# Altium PCB CFD_2Channel.PcbDoc (part 3 of 3)
Units mil, origin at the board's own origin, x right, y up, seen from the top; angles counter-clockwise.
Board outline 5560 x 8750 mil, 4 copper layers (Top Layer, Top Plane, Bottom Plane, Bottom Layer), stack 61.356 mil thick; 216 components, 185 nets, 910 pads, 397 vias.
Unrouted connection lines stored in the file: 1.
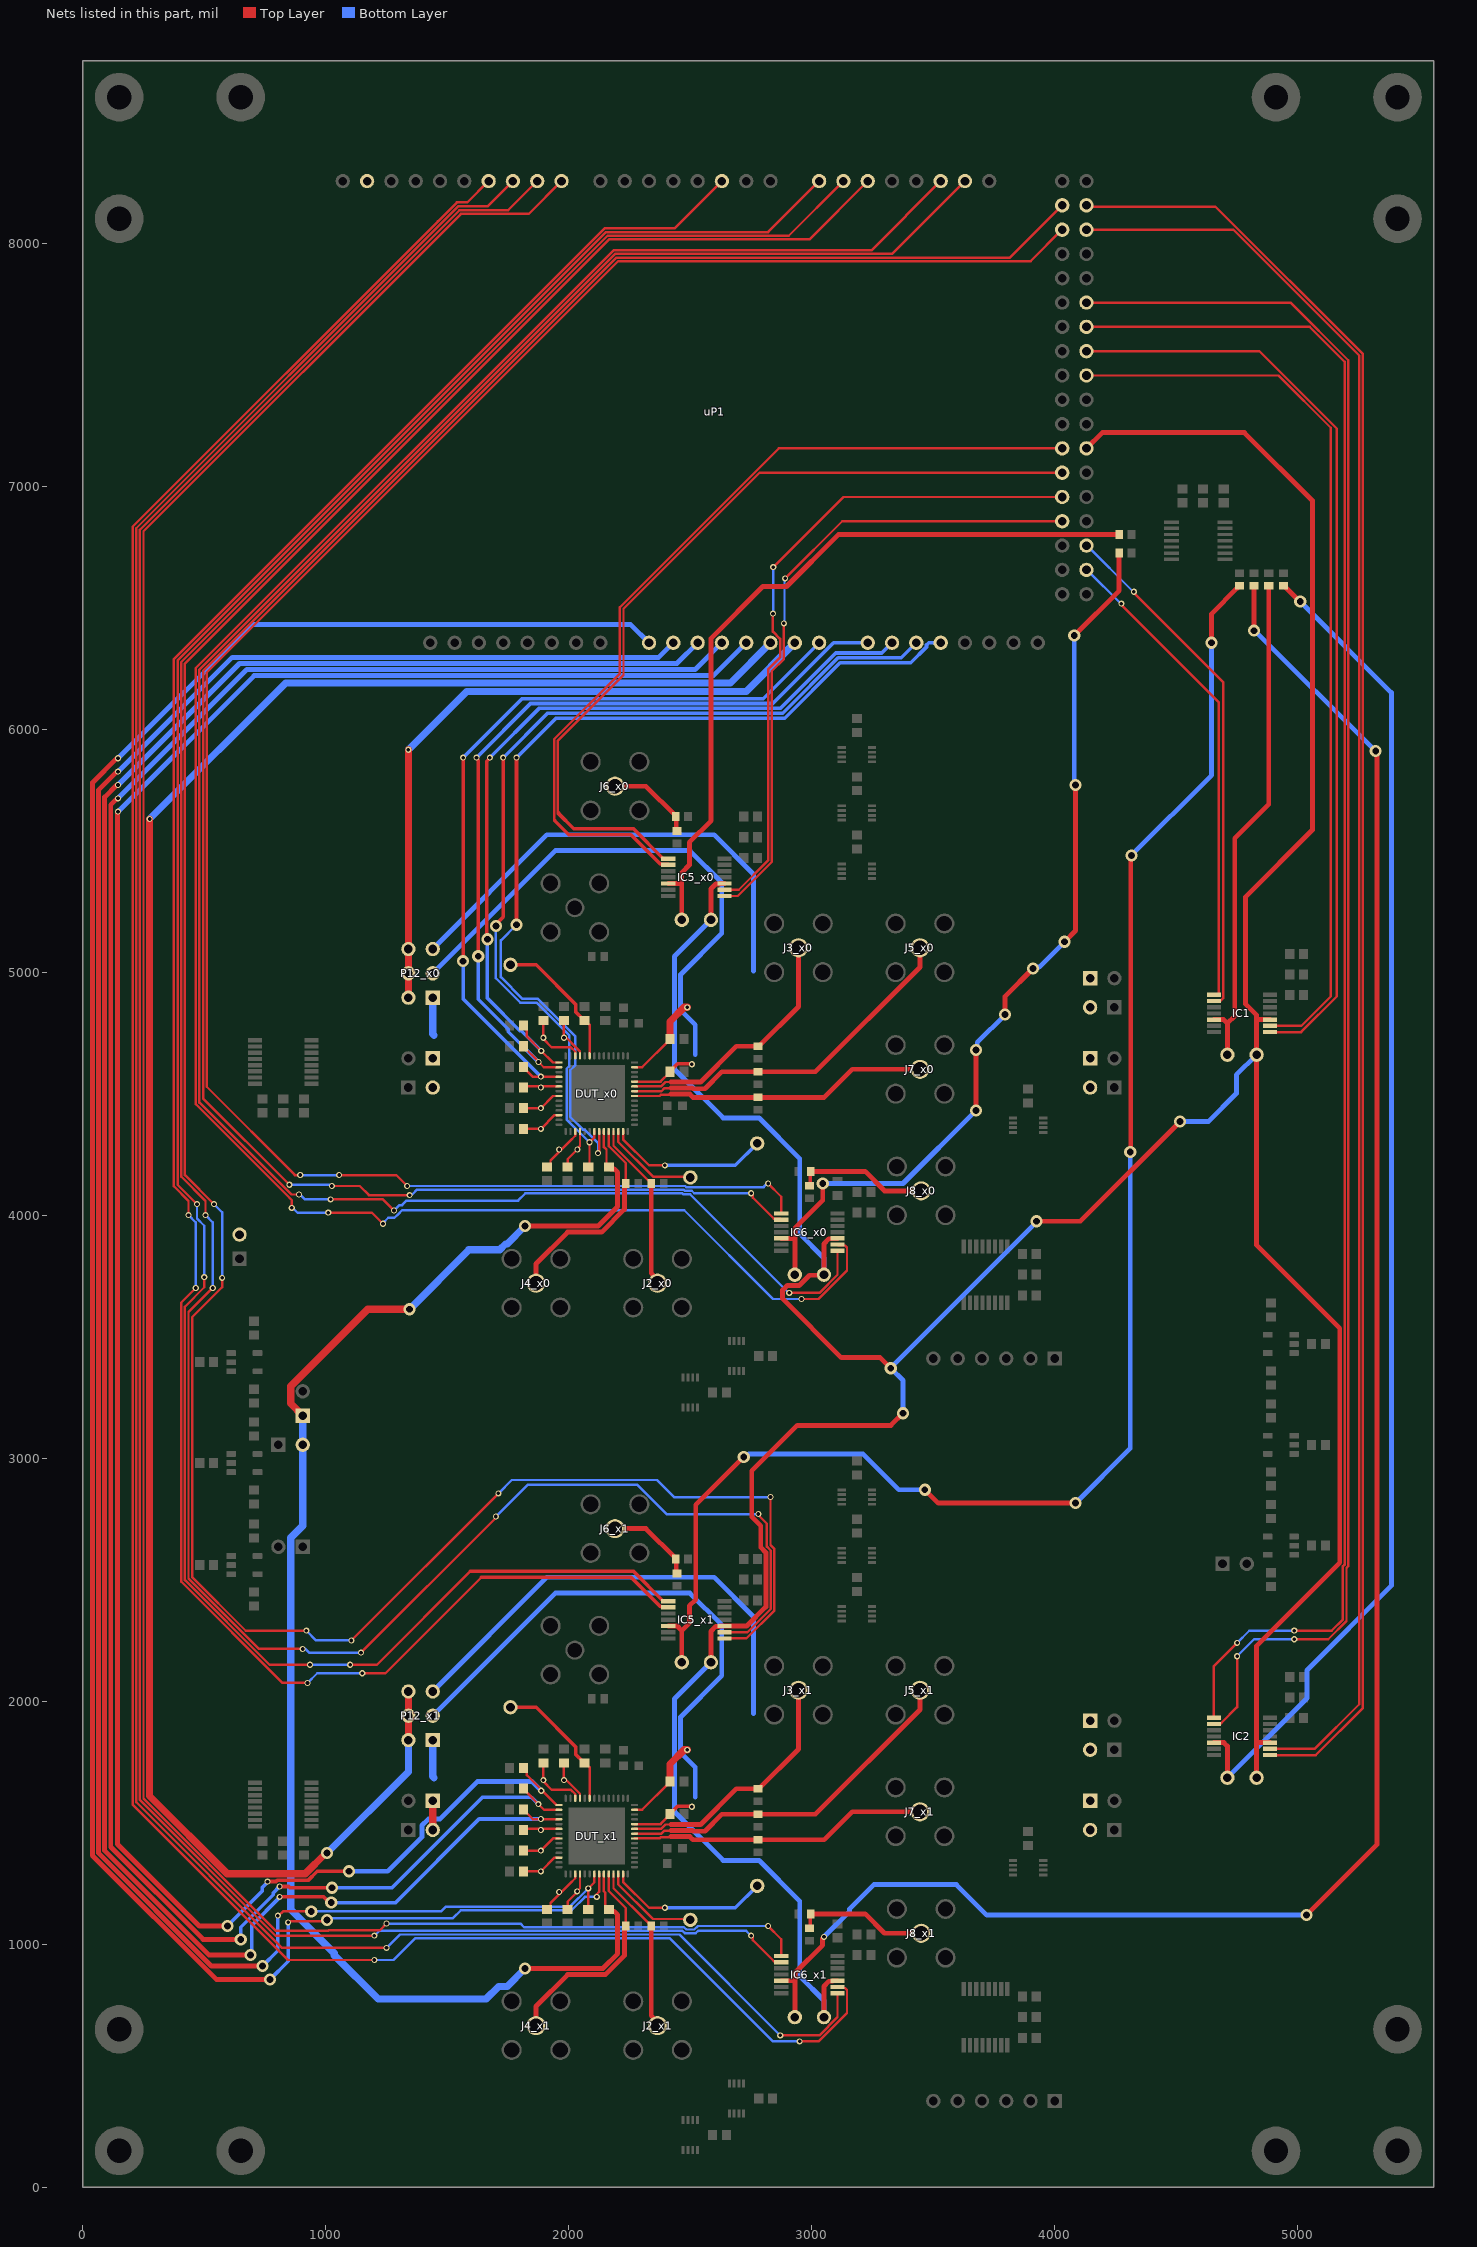
[diagram p5: the nets of this part, all layers, seen from the top]

## Via types
v1: diameter 25, hole 15, Top Layer to Bottom Layer, 290 vias
v2: diameter 50, hole 28, Top Layer to Bottom Layer, 105 vias
v3: diameter 59.06, hole 35.43, Top Layer to Bottom Layer, 2 vias

## Nets (pads, with @x,y where several pads share a name; then routed paths per layer and width w, separated by ;. In a path a pad name is that pad's centre, name@x,y a point inside that pad or via, vN(x,y) a via of type N, cw(c..) or ccw(c..) an arc to the next point about the centre after c; other vN are vias at no path point) (continued)
SPI_DIN_33: IC1.10 IC2.10 IC5_x0.10 IC5_x1.10 IC6_x0.10 IC6_x1.10 P6.1 P8.1 P11_x0.1 P11_x1.1 P14_x0.1 P14_x1.1 uP1.43 | length 15947.3
  Top Layer w20: P11_x1.1@2585,2160 2585,2287.26 2605.42,2307.68 2621.04,2307.68 2622.78,2309.41 IC5_x1.10@2640.67,2309.41 2732.08,2309.41 2810.79,2388.12 2810.79,2611.88 2790,2632.67 2790,2721.11 2752.5,2758.61 2752.5,2947.5 2940,3135 3325,3135 v2(3375,3185) ; P11_x0.1@2585,5215 2585,5342.26 2605.42,5362.68 2621.04,5362.68 2622.78,5364.41 IC5_x0.10@2640.67,5364.41 ; P14_x1.1@3050,700 3050,827.26 3070.42,847.68 3086.04,847.68 3087.78,849.41 IC6_x1.10@3105.67,849.41 ; IC6_x0.10@3105.67,3904.41 3087.78,3904.41 3086.04,3902.68 3070.42,3902.68 3050,3882.26 P14_x0.1@3050,3755 3047.5,3752.5 2990.47,3752.5 2948.44,3710.47 2898.62,3710.47 2879.54,3691.39 2879.54,3656.05 3121.79,3413.8 3281.2,3413.8 v2(3325,3370) ; v2(3925,3975) 4105,3975 v2(4515,4385) ; uP1.43@4130,7155 4195,7220 4780,7220 5060,6940 5060,5585 4785,5310 4785,4868.1 4830,4823.1 4830,4802.68 ; P6.1@4830,1685 4830,1830 ; IC2.10@4885.67,1829.41 4830.59,1829.41 4830,1830 ; IC1.10@4885.67,4804.41 4831.73,4804.41 4830,4802.68 ; 4830,1830 4830,2228.08 5172.24,2570.32 5172.24,3534.32 4830,3876.57 P8.1@4830,4660 4830,4782.26 4830,4802.68
  Bottom Layer w20: P11_x1.1@2585,2160 2435,2010 2435,1545 2635,1345 2782.47,1345 2950,1177.47 2950,868.43 3050,768.43 P14_x1.1@3050,700 ; P11_x0.1@2585,5215 2435,5065 2435,4600 2635,4400 2782.47,4400 2950,4232.47 2950,3923.43 3050,3823.43 P14_x0.1@3050,3755 ; v2(3375,3185) 3375,3320 v2(3325,3370) 3325,3372.5 3925,3972.5 v2(3925,3975) ; v2(4515,4385) 4631.57,4385 4747.05,4500.48 4747.05,4577.05 P8.1@4830,4660
SPI_DOUT_MAIN_DUAL_33: IC1.9 uP1.37 | length 3733.6
  Top Layer w10: uP1.37@4130,7455 4920,7455 5135,7240 5135,4900 5013.82,4778.82 IC1.9@4885.67,4778.82
SPI_DOUT_MAIN_SINGLE_330: IC5_x0.9 uP1.46 | length 2785.1
  Top Layer w10: IC5_x0.9@2640.67,5338.82 2699.42,5338.82 2820,5459.4 2820,6245 2869.53,6294.53 2869.53,6371.37 2840,6400.9 v1(2840,6475) ; v1@2835.87,6660.87 3130,6955 uP1.46@4030,6955
  Bottom Layer w10: v1(2840,6475) 2841.07,6476.07 v1(2841.07,6666.06)
SPI_DOUT_MAIN_SINGLE_331: IC5_x1.9 uP1.15/RX3 | length 10862.7
  Top Layer w10: v1(505,4000) 505,4058.79 405,4158.79 405,4432.11 405,6275.77 2159.23,8030 2905,8030 uP1.15/RX3@3130,8255 ; v1(535,3700) 533.79,3700 435,3601.21 435,2504.64 724.64,2215 v1(905,2215) ; v1(1145,2200) 1697.13,2752.13 1697.13,2757.13 v1(1700,2760) ; IC5_x1.9@2640.67,2283.82 2734.77,2283.82 2830.79,2379.83 2830.79,2620.17 2815,2635.95 2815,2730.01 2780,2765.01 v1(2780,2770)
  Bottom Layer w10: v1(505,4000) 535,3970 v1(535,3700) ; v1(905,2215) 915.82,2215 930.82,2200 v1(1145,2200) ; v1(1700,2760) 1830,2890 2282.6,2890 2402.6,2770 v1(2780,2770)
SPI_DOUT_SMALL_DUAL_33: IC2.9 uP1.25 | length 7328.8
  Top Layer w10: uP1.25@4130,8055 4733.79,8055 5252.24,7536.54 5252.24,3907.76 5252.24,1987.24 5068.82,1803.82 IC2.9@4885.67,1803.82
SPI_DOUT_SMALL_SINGLE_330: IC6_x0.9 uP1.19/RX1 | length 8954
  Top Layer w10: v1(860,4030) 860,4061.97 851.97,4070 465,4456.97 465,6250.92 2184.08,7970 3245,7970 uP1.19/RX1@3530,8255 ; v1(1010,4010) 1190,4010 v1(1235.48,3964.52) ; v1(2957.5,3655) 3027.11,3655 3144.7,3772.59 3144.7,3866.23 3135.97,3874.96 3109.53,3874.96 IC6_x0.9@3105.67,3878.82
  Bottom Layer w10: v1(860,4030) 864.06,4030 884.06,4010 v1(1010,4010) ; v1(1235.48,3964.52) 1235.48,3967.55 1256.95,3989.02 1282.8,3989.02 1296.44,4002.65 1313.79,4020 2475,4020 2840,3655 v1(2957.5,3655)
SPI_DOUT_SMALL_SINGLE_331: IC6_x1.9 uP1.11 | length 10919.3
  Top Layer w10: v1(1200,935) 845,935 205,1575 205,6832.57 1461.21,8088.79 1539.63,8167.2 1582.2,8167.2 uP1.11@1670,8255 ; v1(2950,600) 3027.11,600 3144.7,717.59 3144.7,811.23 3135.97,819.96 3109.53,819.96 IC6_x1.9@3105.67,823.82
  Top Layer w15: uP1.11@1670,8255 uP1.11@1672.03,8252.97
  Bottom Layer w10: v1(1200,935) 1278.79,935 1368.79,1025 2415,1025 2840,600 v1(2950,600)
TDC_CLK_MAIN_DUAL: IC1.5 P9.1 R16.1 | length 2062
  Top Layer w20: IC1.5@4654.33,4804.41 4694.41,4804.41 4710,4788.82 ; P9.1@4710,4660 4710,4788.82 ; R16.1@4880,6589.41 4880,5690 4740,5550 4740,4818.82 4710,4788.82
TDC_CLK_MAIN_SINGLE0: IC5_x0.5 P10_x0.1 R1.1 | length 3114.6
  Top Layer w20: IC5_x0.5@2409.33,5364.41 2460,5364.41 ; P10_x0.1@2465,5215 2465,5409.46 2496.33,5440.78 2496.33,5533.83 2585.47,5622.97 2585.47,6373.44 2798.75,6586.72 2895.61,6586.72 3108.89,6800 R1.1@4264.41,6800
TDC_CLK_MAIN_SINGLE1: IC5_x1.5 P10_x1.1 R18.1 | length 6524.1
  Top Layer w20: IC5_x1.5@2409.33,2309.41 2445.59,2309.41 2465,2290 ; P10_x1.1@2465,2160 2465,2290 ; v2(2720,3005) 2522.5,2807.5 2522.5,2418.13 2496.33,2391.96 2496.33,2321.33 2465,2290 ; v2(3465,2870) 3520,2815 v2(4085,2815) ; v2(4310,4260) 4312.5,4262.5 4312.5,5477.5 v2(4315,5480) ; v2(4645,6355) 4645,6474.41 4751.3,6580.71 4751.3,6583.66 4757.05,6589.41 R18.1@4760,6589.41
  Bottom Layer w20: v2(2720,3005) 2728.12,3005 2740.62,3017.5 3209.93,3017.5 3357.43,2870 v2(3465,2870) ; v2(4085,2815) 4310,3040 v2(4310,4260) ; v2(4315,5480) 4645,5810 v2(4645,6355)
TDC_CLK_SMALL_DUAL: IC2.5 P7.1 R14.1 | length 5563.2
  Top Layer w20: IC2.5@4654.33,1829.41 4695.59,1829.41 4710,1815 P7.1@4710,1685 ; R14.1@4940,6589.41 4942.95,6589.41 5007.36,6525 v2(5010,6525)
  Bottom Layer w20: P7.1@4710,1685 5037.5,2012.5 5037.5,2127.5 5385,2475 5385,6150 v2(5010,6525)
TDC_CLK_SMALL_SINGLE0: IC6_x0.5 P13_x0.1 R17.1 | length 3782.6
  Top Layer w20: IC6_x0.5@2874.33,3904.41 2925,3904.41 ; P13_x0.1@2930,3755 2930,3945.94 3045,4060.94 v2(3045,4130) ; v2(3675,4430) v2(3675,4680) ; v2(3795,4825) 3795,4900 v2(3910,5015) ; v2(4040,5125) 4085,5170 v2(4085,5770) ; v2(4080,6385) 4080.13,6385 4264.41,6569.28 R17.1@4264.41,6725
  Bottom Layer w20: v2(3045,4130) 3375,4130 v2(3675,4430) ; v2(3675,4680) 3680.74,4685.74 3680.74,4710.74 v2(3795,4825) ; v2(3910,5015) 3915.74,5020.74 3935.74,5020.74 v2(4040,5125) ; v2(4080,6385) 4080,5775 v2(4085,5770)
TDC_CLK_SMALL_SINGLE1: IC6_x1.5 P13_x1.1 R15.1 | length 8362.3
  Top Layer w20: IC6_x1.5@2874.33,849.41 2923.63,849.41 ; P13_x1.1@2930,700 2930,855.78 2930,881.57 3044.26,995.83 3044.26,1024.26 v1(3050,1030) ; v2(4820,6405) R15.1@4820,6589.41 ; v2(5035,1120) 5325,1410 5325,5905 v2(5320,5910)
  Bottom Layer w20: v1(3050,1030) 3155.37,1135.37 3155.37,1145.37 3255,1245 3595,1245 3720,1120 v2(5035,1120) ; v2(4820,6405) 4822.5,6405 5317.5,5910 v2(5320,5910)
TDC_EN_MAIN_DUAL_33: IC1.1 uP1.53 | length 1990.1
  Top Layer w10: v1@4272.5,6512.5 4673.58,6111.42 4673.58,4910.63 4669.72,4906.77 IC1.1@4654.33,4906.77
  Bottom Layer w10: uP1.53@4130,6655 4132.65,6655 4271.22,6516.43 v1(4273.87,6516.43)
TDC_EN_MAIN_SINGLE_330: IC5_x0.1 uP1.44 | length 3521.1
  Top Layer w10: 1957.5,5655 1955,5657.5 1955,5952.42 2225,6222.42 2225,6495 2785,7055 uP1.44@4030,7055
  Top Layer w15: 1957.5,5655 1957.5,5652.5 2020,5590 2265.93,5590 2389.15,5466.77 IC5_x0.1@2409.33,5466.77
TDC_EN_MAIN_SINGLE_331: IC5_x1.1 uP1.14/TX3 | length 9663.7
  Top Layer w10: v1(470,4045) 390,4125 390,5677.63 390,6281.98 2153.02,8045 2820,8045 uP1.14/TX3@3030,8255 ; v1(500,3745) 500,3703.18 420,3623.18 420,2498.43 768.43,2150 v1(935,2150) ; v1(1100,2150) 1210,2150 1595,2535
  Top Layer w15: 1595,2535 2265.93,2535 2389.15,2411.77 IC5_x1.1@2409.33,2411.77
  Bottom Layer w10: v1(470,4045) 470,3986.21 500,3956.21 v1(500,3745) ; v1(935,2150) v1(1100,2150)
TDC_EN_SMALL_DUAL_33: IC2.1 uP1.33 | length 7122.8
  Top Layer w10: uP1.33@4130,7655 5048.93,7655 5192.24,7511.69 5192.24,6969.08 5192.24,3542.61 5192.24,2562.04 5185,2554.79 5185,2336.21 5138.79,2290 v1(4985,2290) ; IC2.1@4654.33,1931.77 4654.33,2144.33 v1(4750,2240)
  Bottom Layer w10: v1(4750,2240) 4800,2290 v1(4985,2290)
TDC_EN_SMALL_SINGLE_330: IC6_x0.1 uP1.24 | length 8611.8
  Top Layer w10: v1(895,4165) 873.18,4165 510,4528.18 510,6232.28 2202.72,7925 3900,7925 uP1.24@4030,8055 ; v1(1055,4165) 1290,4165 v1(1335,4120) ; v1(2820,4130) 2874.33,4075.67 IC6_x0.1@2874.33,4006.77
  Bottom Layer w10: v1(895,4165) v1(1055,4165) ; v1(1335,4120) 2479.1,4120 2483.63,4115.47 2801.41,4115.47 2815.94,4130 v1(2820,4130)
TDC_EN_SMALL_SINGLE_331: IC6_x1.1 uP1.8 | length 10501.1
  Top Layer w10: v1(1250,1085) 1222.5,1057.5 1012.5,1057.5 1010,1055 794.64,1055 250,1599.64 250,6813.93 1556.07,8120 1835,8120 uP1.8@1970,8255 ; v1(2820,1075) 2874.33,1020.67 IC6_x1.1@2874.33,951.77
  Bottom Layer w10: v1(1250,1085) 1800.5,1085 1815.5,1070 2474.1,1070 2483.63,1060.47 2516.37,1060.47 2530.9,1075 v1(2820,1075)
TDC_INTRb_MAIN_DUAL_33: IC1.8 uP1.35 | length 3833.4
  Top Layer w10: uP1.35@4130,7555 4841.21,7555 5160,7236.21 5160,4900 5013.23,4753.23 IC1.8@4885.67,4753.23
TDC_INTRb_MAIN_SINGLE_330: IC5_x0.8 uP1.48 | length 2670.9
  Top Layer w10: IC5_x0.8@2640.67,5313.23 2695.04,5313.23 2835,5453.19 2835,6238.79 2885,6288.79 v1(2885,6435) ; v1@2895.88,6625.88 3125,6855 uP1.48@4030,6855
  Bottom Layer w10: v1(2885,6435) 2887.5,6437.5 2887.5,6617.5 v1(2890,6620)
TDC_INTRb_MAIN_SINGLE_331: IC5_x1.8 uP1.16/TX2 | length 11022
  Top Layer w10: v1(540,4045) 420,4165 420,4438.33 420,6269.56 2165.44,8015 2990,8015 uP1.16/TX2@3230,8255 ; v1(573.33,3742.15) 573.33,3703.33 450,3580 450,2510.86 670.86,2290 v1(920,2290) ; v1(1105,2250) v1(1710,2855) ; IC5_x1.8@2640.67,2258.23 2730.39,2258.23 2845.79,2373.62 2845.79,2626.38 2830,2642.17 v1(2830,2840)
  Bottom Layer w10: v1(540,4045) 573.33,4011.67 v1(573.33,3742.15) ; v1(920,2290) 960,2250 v1(1105,2250) ; v1(1710,2855) 1765,2910 2362.97,2910 2432.97,2840 v1(2830,2840)
TDC_INTRb_SMALL_DUAL_33: IC2.8 uP1.23 | length 7423.3
  Top Layer w10: uP1.23@4130,8155 4135,8150 4660,8150 5267.24,7542.76 5267.24,4473.62 5267.24,1972.24 5073.23,1778.23 IC2.8@4885.67,1778.23
TDC_INTRb_SMALL_SINGLE_330: IC6_x0.8 uP1.20/SDA | length 8902.5
  Top Layer w10: v1(890,4085) 858.18,4085 480,4463.18 480,6244.71 2190.29,7955 3330,7955 uP1.20/SDA@3630,8255 ; v1(1020,4065) 1235,4065 v1(1280.98,4019.02) ; v1(2907.04,3680) 3030.9,3680 3105.67,3754.77 IC6_x0.8@3105.67,3853.23
  Bottom Layer w10: v1(890,4085) 894.06,4085 914.06,4065 v1(1020,4065) ; v1(1280.98,4019.02) 1303.36,4041.39 1313.96,4041.39 1332.57,4060 1791.36,4060 1821.36,4090 2466.67,4090 2471.2,4085.47 2499.53,4085.47 2905,3680 v1(2907.04,3680)
TDC_INTRb_SMALL_SINGLE_331: IC6_x1.8 uP1.10 | length 10844.3
  Top Layer w10: v1(1250,985) 820,985 220,1585 220,6826.36 1471.82,8078.18 1545.84,8152.2 1667.2,8152.2 uP1.10@1770,8255 ; v1(2870,625) 3030.9,625 3105.67,699.77 IC6_x1.8@3105.67,798.23
  Top Layer w15: uP1.10@1770,8255 uP1.10@1772.03,8252.97
  Bottom Layer w10: v1(1250,985) 1305,1040 2455,1040 v1(2870,625)
TDC_START_MAIN_x0: J6_x0.1 R6_x0.1 R8_x0.2 | length 364.6
  Top Layer w20: J6_x0.1@2190,5765 2317.36,5765 2439.41,5642.95 R8_x0.2@2439.41,5640 2442.2,5637.2 2442.2,5583.39 R6_x0.1@2445,5580.59
TDC_START_MAIN_x1: J6_x1.1 R6_x1.1 R8_x1.2 | length 364.6
  Top Layer w20: J6_x1.1@2190,2710 2317.36,2710 2439.41,2587.95 R8_x1.2@2439.41,2585 2442.2,2582.2 2442.2,2528.39 R6_x1.1@2445,2525.59
TDC_START_SMALL_x0: J8_x0.1 R9_x0.1 R11_x0.2 | length 549.3
  Top Layer w15: R9_x0.1@2990,4120.59 2992.8,4123.39 2992.8,4177.2 R11_x0.2@2995.59,4180
  Top Layer w20: R11_x0.2@2995.59,4180 3219.13,4180 3299.13,4100 J8_x0.1@3450,4100
TDC_START_SMALL_x1: J8_x1.1 R9_x1.1 R11_x1.2 | length 549.3
  Top Layer w15: R9_x1.1@2990,1065.59 2992.8,1068.39 2992.8,1122.2 R11_x1.2@2995.59,1125
  Top Layer w20: R11_x1.2@2995.59,1125 3219.13,1125 3299.13,1045 J8_x1.1@3450,1045
TDC_TRIGG_MAIN_DUAL_33: IC1.2 uP1.51 | length 2141.8
  Top Layer w10: v1(4325,6565) 4325,6560 4693.37,6191.63 4693.37,4893.77 4684.63,4885.04 4658.19,4885.04 IC1.2@4654.33,4881.18
  Bottom Layer w10: uP1.51@4130,6755 4132.5,6755 4322.5,6565 v1(4325,6565)
TDC_TRIGG_MAIN_SINGLE_330: IC5_x0.2 uP1.42 | length 3624.3
  Top Layer w10: 1942.5,5625 1940,5627.5 1940,5958.63 2210,6228.63 2210,6501.21 2863.79,7155 uP1.42@4030,7155
  Top Layer w15: 1942.5,5625 1942.5,5622.5 2000,5565 2255.53,5565 2375.12,5445.41 2379.01,5445.41 2381.88,5442.54 2407.97,5442.54 IC5_x0.2@2409.33,5441.18
TDC_TRIGG_MAIN_SINGLE_331: IC5_x1.2 uP1.2 | length 9336.4
  Top Layer w10: v1(435,4000) 435,4058.79 375,4118.79 375,5671.42 375,6288.2 2146.8,8060 2435,8060 uP1.2@2630,8255 ; v1(465,3700) 405,3640 405,2492.22 822.22,2075 v1(925,2075) ; v1(1150,2115) 1245.02,2115 1640.02,2510
  Top Layer w15: 1640.02,2510 2255.53,2510 2375.12,2390.41 2379.01,2390.41 2381.88,2387.54 2407.97,2387.54 IC5_x1.2@2409.33,2386.18
  Bottom Layer w10: v1(435,4000) 465,3970 v1(465,3700) ; v1(925,2075) 965,2115 v1(1150,2115)
TDC_TRIGG_SMALL_DUAL_33: IC2.2 uP1.31 | length 7210.4
  Top Layer w10: uP1.31@4130,7755 4970.15,7755 5207.24,7517.9 5207.24,6971.75 5207.24,3548.82 5207.24,2555.82 5200,2548.58 5200,2330 5125,2255 v1(4985,2255) ; IC2.2@4654.33,1906.18 4658.19,1910.04 4684.63,1910.04 4750,1975.41 v1(4750,2185)
  Bottom Layer w10: v1(4750,2185) 4820,2255 v1(4985,2255)
TDC_TRIGG_SMALL_SINGLE_330: IC6_x0.2 uP1.22 | length 8698.3
  Top Layer w10: v1(850,4125) 495,4480 495,6238.49 2196.51,7940 3815,7940 uP1.22@4030,8155 ; v1(1025,4120) 1139.82,4120 1177.32,4082.5 v1(1345,4082.5) ; v1(2750,4090) 2757.65,4082.35 2757.65,4071.41 2844.03,3985.04 2870.47,3985.04 IC6_x0.2@2874.33,3981.18
  Bottom Layer w10: v1(850,4125) 1015.94,4125 1020.94,4120 v1(1025,4120) ; v1(1345,4082.5) 1347.87,4085.37 1355.98,4085.37 1375.61,4105 2472.89,4105 2477.41,4100.47 2505.74,4100.47 2516.21,4090 v1(2750,4090)
TDC_TRIGG_SMALL_SINGLE_331: IC6_x1.2 uP1.9 | length 10402.6
  Top Layer w10: v1(1200,1035) 793.43,1035 235,1593.43 235,6820.15 1549.85,8135 1750,8135 uP1.9@1870,8255 ; v1(2750,1035) 2757.65,1027.35 2757.65,1016.41 2844.03,930.04 2870.47,930.04 IC6_x1.2@2874.33,926.18
  Bottom Layer w10: v1(1200,1035) 1220,1055 2467.89,1055 2477.41,1045.47 2522.59,1045.47 2532.11,1055 2730,1055 v1(2750,1035)
VBG_TEST0: C55_x0.2 DUT_x0.21 uP1.64/A10/ADC10 | length 3855.2
  Top Layer w10: C55_x0.2@2080,4198.54 2085,4203.54 v1(2085,4300) 2105.16,4320.16 DUT_x0.21@2105.16,4344.49
  Top Layer w15: v2(1700,5190) 1700,5197.18 1730,5227.18 v1(1730,5882.5)
  Bottom Layer w10: v2(1700,5190) 1700,4975 1800.22,4874.78 1867.04,4874.78 2002.5,4739.32 2002.5,4613.76 1990.89,4602.15 1990.89,4394.11 v1(2085,4300)
  Bottom Layer w15: v1(1730,5882.5) 1912.5,6065 2880,6065 3107.97,6292.97 3367.97,6292.97 uP1.64/A10/ADC10@3430,6355
VBG_TEST1: C55_x1.2 DUT_x1.21 uP1.55/A1/ADC1 | length 9567
  Top Layer w10: v1(802.86,1117.35) 806.45,1117.35 824.1,1135 v2(940,1135) ; C55_x1.2@2080,1143.54 v1(2080,1230) 2105.16,1255.16 DUT_x1.21@2105.16,1289.49
  Top Layer w20: v1@140,5825 65,5750 65,1374.64 529.64,910 v2(740,910)
  Bottom Layer w10: v2(940,1135) 1474.13,1135 1494.13,1155 2005,1155 v1(2080,1230)
  Bottom Layer w15: v2(740,910) 802.86,972.86 v1(802.86,1117.35)
  Bottom Layer w20: v1(145,5825) 615,6295 2370,6295 uP1.55/A1/ADC1@2430,6355
VDAC_MAIN0: C57_x0.2 DUT_x0.2 uP1.62/A8/ADC8 | length 3347.8
  Top Layer w10: C57_x0.2@1813.54,4695 1813.54,4693.03 1875,4631.57 v1(1875,4630) 1896.73,4608.27 DUT_x0.2@1959.49,4608.27
  Top Layer w15: v1(1620,5882.5) 1620,5879.79 1627.5,5872.29 v2(1627.5,5065)
  Bottom Layer w15: v1(1620,5882.5) 1842.5,6105 2839.44,6105 3089.44,6355 uP1.62/A8/ADC8@3230,6355 ; v2(1627.5,5065) 1627.5,4887.86 1750.29,4765.06 1750.29,4754.71 v1(1875,4630)
VDAC_MAIN1: C57_x1.2 DUT_x1.2 uP1.57/A3/ADC3 | length 9467.9
  Top Layer w10: C57_x1.2@1813.54,1640 1813.54,1638.03 1898.31,1553.27 DUT_x1.2@1959.49,1553.27
  Top Layer w15: v1(810,1237.5) 847.5,1237.5 852.5,1232.5 v2(1025,1232.5)
  Top Layer w20: v1@140,5715 140,5713.65 115,5688.65 115,1400 495,1020 v2(650,1020)
  Bottom Layer w15: v2(650,1020) 650,1070.36 783.52,1203.88 783.52,1211.02 v1(810,1237.5) ; v2(1025,1232.5) 1272.5,1232.5 1645,1605 1846.04,1605 v1(1874.94,1576.1)
  Bottom Layer w20: v1(145,5715) 675,6245 2520,6245 uP1.57/A3/ADC3@2630,6355
VDAC_SMALL0: C56_x0.2 DUT_x0.4 uP1.61/A7/ADC7 | length 3270.7
  Top Layer w10: C56_x0.2@1813.54,4610 1813.54,4608.03 1852.5,4569.08 1884.08,4569.08 v1(1885,4570) 1886.02,4568.98 1959.41,4568.98 DUT_x0.4@1959.49,4568.9
  Top Layer w15: v2(1565,5045) v1(1565,5882.5)
  Bottom Layer w15: v2(1565,5045) 1565,4890 v1(1885,4570) ; v1(1565,5882.5) 1807.5,6125 2800,6125 uP1.61/A7/ADC7@3030,6355
VDAC_SMALL1: C56_x1.2 DUT_x1.4 uP1.56/A2/ADC2 | length 9494
  Top Layer w10: C56_x1.2@1813.54,1555 1813.54,1553.03 1852.5,1514.08 1884.08,1514.08 v1(1885,1515) 1886.02,1513.98 1959.41,1513.98 DUT_x1.4@1959.49,1513.9
  Top Layer w15: v1(810,1195) 990.53,1195 1013.28,1172.25 v2(1022.75,1172.25)
  Top Layer w20: v1@140,5770 90,5720 90,1385 520,955 v2(690,955)
  Bottom Layer w15: v2(690,955) 695,960 695,1077.29 810,1192.29 v1(810,1195) ; v2(1022.75,1172.25) 1025,1170 1285.88,1170 1630.88,1515 v1(1885,1515)
  Bottom Layer w20: v1(145,5770) 645,6270 2445,6270 uP1.56/A2/ADC2@2530,6355
VDDAON0: C46_x0.2 C47_x0.2 C48_x0.2 C49_x0.2 DUT_x0.6 DUT_x0.12 DUT_x0.18 DUT_x0.53 P12_x0.1 P19_x0.2 P20_x0.1 | length 814.6
  Top Layer w10: C47_x0.2@1813.54,4355 v1(1885,4355) 1941.42,4411.42 DUT_x0.12@1959.49,4411.42 ; C46_x0.2@1813.54,4525 1818.07,4529.53 DUT_x0.6@1959.49,4529.53 ; C49_x0.2@1980,4801.46 1980,4740 2046.1,4673.9 DUT_x0.53@2046.1,4655.51 ; C48_x0.2@1995,4198.54 1995,4230 v1(2035,4270) 2035,4274.06 2046.1,4285.16 DUT_x0.18@2046.1,4344.49
  Bottom Layer w30: P12_x0.1@1440,4895 1440,4745 1445,4740
  other v1: 1885,4525 1980,4730
VDDAON1: C46_x1.2 C47_x1.2 C48_x1.2 C49_x1.2 DUT_x1.6 DUT_x1.12 DUT_x1.18 DUT_x1.53 P12_x1.1 P19_x1.2 P20_x1.1 | length 932.7
  Top Layer w10: C47_x1.2@1813.54,1300 v1(1885,1300) 1941.42,1356.42 DUT_x1.12@1959.49,1356.42 ; C46_x1.2@1813.54,1470 1818.07,1474.53 DUT_x1.6@1959.49,1474.53 ; C49_x1.2@1980,1746.46 1980,1685 2046.1,1618.9 DUT_x1.53@2046.1,1600.51 ; C48_x1.2@1995,1143.54 1995,1175 2034.09,1214.09 v1(2034.09,1217.5) ; v1@2035,1219.06 2046.1,1230.16 DUT_x1.18@2046.1,1289.49
  Top Layer w30: P19_x1.2@1440,1470 P20_x1.1@1440,1590
  Bottom Layer w30: P12_x1.1@1440,1840 1440,1690 1445,1685
  other v1: 1885,1470 1980,1675
VDDHV: C52_x0.2 C52_x1.2 C53_x0.2 C53_x1.2 C54_x0.2 C54_x1.2 DUT_x0.8 DUT_x0.17 DUT_x0.54 DUT_x1.8 DUT_x1.17 DUT_x1.54 P3.2 | length 1216.9
  Top Layer w10: C52_x1.2@1813.54,1385 v1(1885,1385) 1935.16,1435.16 DUT_x1.8@1959.49,1435.16 ; C52_x0.2@1813.54,4440 v1(1885,4440) 1935.16,4490.16 DUT_x0.8@1959.49,4490.16 ; C54_x1.2@1895,1746.46 1895,1670 1895.94,1670 1897.87,1668.07 1897.87,1667.13 1930,1635 2008.79,1635 2026.34,1617.45 2026.34,1600.59 DUT_x1.54@2026.42,1600.51 ; C54_x0.2@1895,4801.46 1895,4725 1895.94,4725 1897.87,4723.07 1897.87,4722.13 1930,4690 2008.79,4690 2026.34,4672.45 2026.34,4655.59 DUT_x0.54@2026.42,4655.51 ; C53_x1.2@1910,1143.54 1910.86,1143.54 1924.56,1157.24 1924.56,1169.56 2005,1250 2026.42,1271.42 DUT_x1.17@2026.42,1289.49 ; C53_x0.2@1910,4198.54 1910.86,4198.54 1924.56,4212.24 1924.56,4224.56 2005,4305 2026.42,4326.42 DUT_x0.17@2026.42,4344.49
  other v1: 1960,1215 1895,1675 1960,4270 1895,4730
VDDMAIN0: C50_x0.2 DUT_x0.41 P12_x0.5 P21_x0.2 P22_x0.1 | length 2342.1
  Top Layer w10: DUT_x0.41@2270.51,4608.27 2301.69,4608.27 2416.46,4723.03 C50_x0.2@2416.46,4725
  Top Layer w30: C50_x0.2@2416.46,4725 2416.46,4796.46 2475,4855 v1(2487.5,4855)
  Bottom Layer w20: P12_x0.5@1440,5095 1910,5565 2598.28,5565 2760,5403.28 2760,5005
VDDMAIN1: C50_x1.2 DUT_x1.41 P12_x1.5 P21_x1.2 P22_x1.1 | length 2342.1
  Top Layer w10: DUT_x1.41@2270.51,1553.27 2301.69,1553.27 2416.46,1668.03 C50_x1.2@2416.46,1670
  Top Layer w30: C50_x1.2@2416.46,1670 2416.46,1741.46 2475,1800 v1(2487.5,1800)
  Bottom Layer w20: P12_x1.5@1440,2040 1910,2510 2598.28,2510 2760,2348.28 2760,1950
VDDMEAS0: P12_x0.2 P12_x0.4 P12_x0.6 uP1.60/A6/ADC6 | length 2792.3
  Top Layer w30: P12_x0.2@1340,4895 P12_x0.4@1340,4995 P12_x0.6@1340,5095 v1(1340,5915)
  Bottom Layer w30: v1(1340,5915) 1580,6155 2730,6155 uP1.60/A6/ADC6@2930,6355
VDDMEAS1: P12_x1.2 P12_x1.4 P12_x1.6 uP1.59/A5/ADC5 | length 8576.8
  Top Layer w30: v1(275,5630) 275,1610 595,1290 915.49,1290 1000.49,1375 v2(1005,1375) ; P12_x1.2@1340,1840 P12_x1.4@1340,1940 P12_x1.6@1340,2040
  Bottom Layer w30: v1(275,5630) 835,6190 2665,6190 uP1.59/A5/ADC5@2830,6355 ; v2(1005,1375) 1340,1710 P12_x1.2@1340,1840
VDDSMALL0: C60_x0.2 DUT_x0.38 P12_x0.3 P23_x0.2 P24_x0.1 | length 2526.9
  Top Layer w10: DUT_x0.38@2270.51,4549.21 2377.64,4549.21 2416.46,4588.03 C60_x0.2@2416.46,4590
  Top Layer w15: C60_x0.2@2416.46,4590 2416.46,4591.97 2447.66,4623.17 2497.42,4623.17 2497.92,4622.67 2504.63,4622.67 v1(2506.54,4620.76)
  Bottom Layer w20: P12_x0.3@1440,4995 1945,5500 2498.28,5500 2629.53,5368.76 2629.53,5159.53 2460,4990 2460,4843.61 2520,4783.61 2520,4660
VDDSMALL1: C60_x1.2 DUT_x1.38 P12_x1.3 P23_x1.2 P24_x1.1 | length 2526.9
  Top Layer w10: DUT_x1.38@2270.51,1494.21 2377.64,1494.21 2416.46,1533.03 C60_x1.2@2416.46,1535
  Top Layer w15: C60_x1.2@2416.46,1535 2416.46,1536.97 2447.66,1568.17 2497.42,1568.17 2497.92,1567.67 2504.63,1567.67 v1(2506.54,1565.76)
  Bottom Layer w20: P12_x1.3@1440,1940 1945,2445 2498.28,2445 2629.53,2313.76 2629.53,2104.53 2460,1935 2460,1788.61 2520,1728.61 2520,1605
VDDTEST: C61_x0.2 C61_x1.2 DUT_x0.23 DUT_x1.23 P4.2 P5.1 | length 6124.1
  Top Layer w10: DUT_x1.23@2144.53,1289.49 2144.53,1217.78 2150,1212.31 2150,1156.58 C61_x1.2@2163.03,1143.54 ; DUT_x0.23@2144.53,4344.49 2144.53,4279.97 2155,4269.5 2155,4206.58 C61_x0.2@2163.03,4198.54
  Top Layer w20: v2(1820,900) 2140,900 2200.67,960.67 2200.67,1121.13 2186.95,1134.84 2173.7,1134.84 C61_x1.2@2165,1143.54 ; v2(1820,3955) 2120,3955 2200.67,4035.67 2200.67,4176.13 2186.95,4189.84 2173.7,4189.84 C61_x0.2@2165,4198.54
  Top Layer w30: P5.1@905,3175 855.47,3224.53 855.47,3295.52 1172.84,3612.89 v2(1344.95,3612.89)
  Bottom Layer w30: P5.1@905,3175 P4.2@905,3055 905,2722.34 855.47,2672.81 855.47,1143.17 1035.24,963.4 1035.24,954.76 1215,775 1660.36,775 1711.69,826.34 1746.34,826.34 v2(1820,900) ; v2(1344.95,3612.89) 1587.5,3855.44 1587.5,3857.5 1715.75,3857.5 1739.59,3881.34 1746.34,3881.34 v2(1820,3955)
VIN_DELAY_TEST_x0: DUT_x0.25 J2_x0.1 R3_x0.2 | length 701.2
  Top Layer w10: DUT_x0.25@2183.9,4344.49 2183.98,4344.41 2183.98,4285.43 2325.71,4143.7 2328.66,4143.7 2339.41,4132.95 R3_x0.2@2339.41,4130
  Top Layer w20: R3_x0.2@2339.41,4130 2339.41,3761.49 2365,3735.9 J2_x0.1@2365,3720
VIN_DELAY_TEST_x1: DUT_x1.25 J2_x1.1 R3_x1.2 | length 701.2
  Top Layer w10: DUT_x1.25@2183.9,1289.49 2183.98,1289.41 2183.98,1230.43 2325.71,1088.7 2328.66,1088.7 2339.41,1077.95 R3_x1.2@2339.41,1075
  Top Layer w20: R3_x1.2@2339.41,1075 2339.41,706.49 2365,680.9 J2_x1.1@2365,665
VIN_PK_TEST_x0: DUT_x0.24 J4_x0.1 R5_x0.2 | length 888.4
  Top Layer w10: DUT_x0.24@2164.21,4344.49 2164.21,4283.98 2234.41,4213.78 R5_x0.2@2234.41,4130
  Top Layer w20: J4_x0.1@1865,3720 1865,3799.67 1995.33,3930 2135,3930 2228.66,4023.66 2228.66,4121.3 2234.41,4127.05 R5_x0.2@2234.41,4130
VIN_PK_TEST_x1: DUT_x1.24 J4_x1.1 R5_x1.2 | length 897.4
  Top Layer w10: DUT_x1.24@2164.21,1289.49 2164.21,1219.31 2234.41,1149.11 R5_x1.2@2234.41,1075
  Top Layer w20: J4_x1.1@1865,665 1865,744.67 1995.33,875 2150.36,875 2228.66,953.31 2228.66,1066.3 2234.41,1072.05 R5_x1.2@2234.41,1075
VINN_ZCD_SMALL_x0: DUT_x0.36 J5_x0.1 R7_x0.2 | length 1467.9
  Top Layer w10: DUT_x0.36@2270.51,4509.84 2380.69,4509.84 2393.57,4522.72 2420,4522.72
  Top Layer w20: 2420,4522.72 2508.49,4522.72 2511.21,4520 2560.36,4520 2630.14,4589.78 R7_x0.2@2779.2,4589.78 3014.45,4589.78 3445,5020.33 J5_x0.1@3445,5100
VINN_ZCD_SMALL_x1: DUT_x1.36 J5_x1.1 R7_x1.2 | length 1467.9
  Top Layer w10: DUT_x1.36@2270.51,1454.84 2380.69,1454.84 2393.57,1467.72 2420,1467.72
  Top Layer w20: 2420,1467.72 2508.49,1467.72 2511.21,1465 2560.36,1465 2630.14,1534.78 R7_x1.2@2779.2,1534.78 3014.45,1534.78 3445,1965.33 J5_x1.1@3445,2045
VINP_LED_SMALL_x0: DUT_x0.37 J3_x0.1 R4_x0.2 | length 1052.8
  Top Layer w10: DUT_x0.37@2270.51,4529.53 2379.17,4529.53 2397.36,4547.72 2420,4547.72
  Top Layer w20: 2420,4547.72 2542.72,4547.72 2689.78,4694.78 R4_x0.2@2779.2,4694.78 2782.15,4694.78 2945,4857.63 J3_x0.1@2945,5100
VINP_LED_SMALL_x1: DUT_x1.37 J3_x1.1 R4_x1.2 | length 1052.8
  Top Layer w10: DUT_x1.37@2270.51,1474.53 2379.17,1474.53 2397.36,1492.72 2420,1492.72
  Top Layer w20: 2420,1492.72 2542.72,1492.72 2689.78,1639.78 R4_x1.2@2779.2,1639.78 2782.15,1639.78 2945,1802.63 J3_x1.1@2945,2045
VINP_ZCD_SMALL_x0: DUT_x0.35 J7_x0.1 R10_x0.2 | length 1230.7
  Top Layer w10: DUT_x0.35@2270.51,4490.16 2374.37,4490.16 2379.05,4494.84 2417.13,4494.84 2420,4497.72
  Top Layer w20: 2420,4497.72 2498.14,4497.72 2511.07,4484.78 3050.89,4484.78 3166.11,4600 J7_x0.1@3445,4600
VINP_ZCD_SMALL_x1: DUT_x1.35 J7_x1.1 R10_x1.2 | length 1230.7
  Top Layer w10: DUT_x1.35@2270.51,1435.16 2374.37,1435.16 2379.05,1439.84 2417.13,1439.84 2420,1442.72
  Top Layer w20: 2420,1442.72 2498.14,1442.72 2511.07,1429.78 3050.89,1429.78 3166.11,1545 J7_x1.1@3445,1545
VOUT_DELAY_TEST_x0: DUT_x0.26 P17_x0.1 | length 400.1
  Top Layer w10: DUT_x0.26@2203.58,4344.49 2203.58,4301.42 2346.3,4158.7 2496.3,4158.7 P17_x0.1@2500,4155
VOUT_DELAY_TEST_x1: DUT_x1.26 P17_x1.1 | length 400.1
  Top Layer w10: DUT_x1.26@2203.58,1289.49 2203.58,1246.42 2346.3,1103.7 2496.3,1103.7 P17_x1.1@2500,1100
VOUT_PK_TEST0: DUT_x0.22 uP1.65/A11/ADC11 | length 3914.5
  Top Layer w10: v1(2120,4255) 2124.76,4259.76 2124.76,4344.41 DUT_x0.22@2124.84,4344.49
  Top Layer w15: v2(1785,5195) v1(1785,5882.5)
  Bottom Layer w10: v2(1785,5195) 1720.47,5130.47 1720.47,4979.53 1810,4890 1873.03,4890 2025.83,4737.2 2025.83,4615.88 2005.89,4595.93 2005.89,4404.07 2058.07,4351.88 2064.94,4351.88 2120,4296.82 v1(2120,4255)
  Bottom Layer w15: v1(1785,5882.5) 1947.5,6045 2888.28,6045 3116.26,6272.97 3407.41,6272.97 3472.03,6337.59 3472.03,6346.21 3480.81,6355 uP1.65/A11/ADC11@3530,6355
VOUT_PK_TEST1: DUT_x1.22 uP1.54/A0/ADC0 | length 9620.1
  Top Layer w10: v1(845,1090) 850,1095 1000,1095 v2(1005,1100) ; v1(2115,1195) 2115,1205.82 2124.84,1215.67 DUT_x1.22@2124.84,1289.49
  Top Layer w20: v1@140,5880 40,5780 40,1364.29 549.29,855 v2(770,855)
  Bottom Layer w10: v2(1005,1100) 1012.5,1107.5 1523.38,1107.5 1555.88,1140 2011.21,1140 2066.21,1195 v1(2115,1195)
  Bottom Layer w15: v2(770,855) 845,930 v1(845,1090)
  Bottom Layer w20: v1(145,5880) 695,6430 2255,6430 uP1.54/A0/ADC0@2330,6355
VREF_ATTEN_MAIN0: C59_x0.2 DUT_x0.51 P15_x0.1 | length 573.5
  Top Layer w10: C59_x0.2@2065,4801.46 2066.97,4801.46 2085.47,4782.95 DUT_x0.51@2085.47,4655.51
  Top Layer w15: P15_x0.1@1760,5030 1865.59,5030 2028.84,4866.75 2028.84,4835.65 2063.03,4801.46 C59_x0.2@2065,4801.46
VREF_ATTEN_MAIN1: C59_x1.2 DUT_x1.51 P15_x1.1 | length 573.5
  Top Layer w10: C59_x1.2@2065,1746.46 2066.97,1746.46 2085.47,1727.95 DUT_x1.51@2085.47,1600.51
  Top Layer w15: P15_x1.1@1760,1975 1865.59,1975 2028.84,1811.75 2028.84,1780.65 2063.03,1746.46 C59_x1.2@2065,1746.46
VREF_PREAMP0: C58_x0.2 DUT_x0.1 uP1.63/A9/ADC9 | length 3385.5
  Top Layer w10: C58_x0.2@1813.54,4780 1827.24,4766.3 1827.24,4735.17 v1(1886.45,4675.97) 1934.46,4627.95 DUT_x0.1@1959.49,4627.95
  Top Layer w15: v2(1665,5135) 1662.5,5137.5 1662.5,5867.29 1675,5879.79 v1(1675,5882.5)
  Bottom Layer w15: v2(1665,5135) 1665,4891.97 1798.29,4758.67 1803.74,4758.67 v1(1886.45,4675.97) ; v1(1675,5882.5) 1877.5,6085 2870,6085 3097.97,6312.97 3287.97,6312.97 uP1.63/A9/ADC9@3330,6355
VREF_PREAMP1: C58_x1.2 DUT_x1.1 uP1.58/A4/ADC4 | length 9523.1
  Top Layer w10: C58_x1.2@1813.54,1725 1827.24,1711.3 1827.24,1695.51 1949.8,1572.95 DUT_x1.1@1959.49,1572.95
  Top Layer w15: v1(760,1257.5) 760.36,1257.86 795,1257.86 799.64,1262.5 926.89,1262.5 964.39,1300 v2(1095,1300)
  Top Layer w20: v1@142.5,5660 142.5,1412.5 480,1075 v2(595,1075)
  Bottom Layer w15: v2(595,1075) 738.7,1218.7 738.7,1233.49 760,1254.79 v1(760,1257.5)
  Bottom Layer w20: v1(145,5660) 705,6220 2595,6220 uP1.58/A4/ADC4@2730,6355 ; v2(1095,1300) 1255,1300 1395.47,1440.47 1395.47,1488.44 1421.56,1514.53 1469.53,1514.53 1625,1670 1847.94,1670 v1(1886.48,1631.46)
VRST_PK_TEST0: DUT_x0.27 P18_x0.1 | length 666
  Top Layer w10: DUT_x0.27@2223.27,4344.49 2223.27,4311.73 2330,4205 v1(2395,4205)
  Bottom Layer w15: v1(2395,4205) 2685,4205 P18_x0.1@2775,4295
VRST_PK_TEST1: DUT_x1.27 P18_x1.1 | length 666
  Top Layer w10: DUT_x1.27@2223.27,1289.49 2223.27,1256.73 2330,1150 v1(2395,1150)
  Bottom Layer w15: v1(2395,1150) 2685,1150 P18_x1.1@2775,1240
pads on no net: DUT_x0.3 DUT_x0.5 DUT_x0.9 DUT_x0.11 DUT_x0.14 DUT_x0.20 DUT_x0.44 DUT_x0.47 DUT_x0.49 DUT_x0.52 DUT_x0.55 DUT_x1.3 DUT_x1.5 DUT_x1.9 DUT_x1.11 DUT_x1.14 DUT_x1.20 DUT_x1.44 DUT_x1.47 DUT_x1.49 DUT_x1.52 DUT_x1.55 IC1.6 IC2.6 IC4.1 IC4.7 IC4.8 IC5_x0.6 IC5_x1.6 IC6_x0.6 IC6_x1.6 IC7_x0.3 IC7_x1.3 IC9_x0.3 IC9_x1.3 IC10_x0.3 IC10_x1.3 IC11_x0.3 IC11_x1.3 IC12_x0.3 IC12_x1.3 IC13_x0.3 IC13_x1.3 uP1.0/RX0 uP1.1/TX0 uP1.21/SCL uP1.47 uP1.49 uP1.50 uP1.52 uP1.66/DAC0 uP1.67/DAC1 uP1.68/CANRX uP1.69/CANTX uP1.+3.3V uP1.+5V uP1.AREF uP1.IOREF uP1.NC uP1.RESET uP1.VIN

## Polygon pours and split planes (outlines as drawn)
+3.3VPSU on Bottom Layer "33PSU_tot" (solid, remove dead copper, pour order 15): 0,0 0,8750 5560,8750 5560,0
+3.3VPSU on Bottom Layer "33PSU_x1" (solid, remove dead copper, pour order 13): 465,2780 5130,2780 5130,400 465,400
+1.8VPSU on Bottom Layer "18PSU_x1" (solid, remove dead copper, pour order 12): 1285,2610 4310,2610 4310,1000 1285,1000
VDDAON1 on Bottom Layer "AON_x1" (solid, remove dead copper, pour order 11): 1405,1190 1405,1700 2050,1700 2050,1190
+3.3VPSU on Bottom Layer "33PSU_x0" (solid, remove dead copper, pour order 8): 465,4765 1640,5835 5130,5835 5130,3455 465,3455
+1.8VPSU on Bottom Layer "18PSU_x0" (solid, remove dead copper, pour order 4): 1285,5010 4310,5010 4310,4055 1285,4055
VDDAON0 on Bottom Layer "AON_x0" (solid, remove dead copper, pour order 2): 1405,4245 1405,4755 2050,4755 2050,4245
+3.3VPSU on Bottom Layer "33PSU_mid" (solid, remove dead copper, pour order 14): 465,3630 5130,3630 5130,2595 465,2595
+1.8VD on Bottom Layer "18D_mid" (solid, remove dead copper, pour order 7): 3230,2970 4000,2970 4000,4255 4305,4255 4305,2970 4840,2970 4840,2100 3230,2100
VDDSMALL0 on Bottom Layer "SMALL_x0" (solid, remove dead copper, pour order 1): 2490,4685 4175,4685 4175,4485 2490,4485
VDDSMALL1 on Bottom Layer "SMALL_x1" (solid, remove dead copper, pour order 10): 2490,1630 4175,1630 4175,1430 2490,1430
+1.8VPSU on Bottom Layer "18PSU_mid" (solid, remove dead copper, pour order 5): 4305,2525 4305,4435 4735,4435 4735,2525
VDDMAIN0 on Bottom Layer "MAIN_x0" (solid, remove dead copper, pour order 0): 2460,5015 4185,5015 4185,4825 2460,4825
VDDMAIN1 on Bottom Layer "MAIN_x1" (solid, remove dead copper, pour order 9): 2460,1960 4185,1960 4185,1770 2460,1770
VDDHV on Bottom Plane (split plane): 5539.9,20.1 20.1,20.1 20.1,8729.9 5539.9,8729.9
GND on Top Plane (split plane): 5539.9,20.1 20.1,20.1 20.1,8729.9 5539.9,8729.9

## Other copper
Top Layer:
  region net +3.3VPSU: 4525,6685 4525,6915 4505,6915 4505,6950 4715,6950 4715,6915 4655,6915 4655,6685
  region net +3.3VPSU: 630,2530 500,2530 500,2590 630,2590 630,2610 465,2610 465,2510 630,2510
  region net +3.3VPSU: 630,2950 500,2950 500,3010 630,3010 630,3030 465,3030 465,2930 630,2930
  region net +3.3VPSU: 630,3365 500,3365 500,3425 630,3425 630,3445 465,3445 465,3345 630,3345
  region net +3.3VPSU: 4885,4900 4885,5100 4985,5100 4985,4965 4915,4965 4915,4900
  region net +1.8VD: 2775,385 2775,345 2725,345 2725,285 2695,285 2695,445 2705,445 2705,385
  region net +1.8VD: 2585,235 2585,195 2535,195 2535,135 2505,135 2505,295 2515,295 2515,235
  region net +3.3VPSU: 2640,2405 2640,2695 2740,2695 2740,2470 2670,2470 2670,2405
  region net +1.8VD: 3165,2460 3265,2460 3265,2395 3265,2365 3105,2365 3105,2375 3165,2375
  region net +1.8VD: 3695,740 3885,740 3885,910 3850,910 3850,780 3735,780 3735,840 3695,840
  region net +1.8VD: 3870,1425 3910,1425 3910,1350 3970,1350 3970,1320 3810,1320 3810,1330 3870,1330
  region net +3.3VPSU: 3720,720 3885,720 3885,595 3850,595 3850,630 3735,630 3735,555 3720,555
  region net +1.8VD: 3165,2700 3265,2700 3265,2635 3265,2605 3105,2605 3105,2615 3165,2615
  region net +1.8VD: 3165,2940 3265,2940 3265,2875 3265,2845 3105,2845 3105,2855 3165,2855
  region net +3.3VPSU: 3085,1045 3165,1045 3165,1060 3205,1060 3205,1020 3135,1020 3135,945 3085,945
  region net +3.3VPSU: 4885,1925 4885,2125 4985,2125 4985,1990 4915,1990 4915,1925
  region net +1.8VD: 4765,2615 4895,2615 4895,2510 4765,2510
  region net +1.8VDDTEST: 700,3110 840,3110 840,3005 700,3005
  region net +1.8VD_SHIFT: 700,2690 840,2690 840,2585 700,2585
  region net +1.8VD_SHIFT: 865,4650 865,4460 930,4460 930,4495 905,4495 905,4610 965,4610 965,4650
  region net +3.3VPSU: 845,4625 845,4460 720,4460 720,4495 755,4495 755,4610 680,4610 680,4625
  region net +3.3VPSU: 4965,3500 5095,3500 5095,3440 4965,3440 4965,3420 5130,3420 5130,3520 4965,3520
  region net +3.3VPSU: 4965,3085 5095,3085 5095,3025 4965,3025 4965,3005 5130,3005 5130,3105 4965,3105
  region net +3.3VPSU: 4965,2670 5095,2670 5095,2610 4965,2610 4965,2590 5130,2590 5130,2690 4965,2690
  region net +3.3VPSU: 845,1570 845,1405 720,1405 720,1440 755,1440 755,1555 680,1555 680,1570
  region net +1.8VD_SHIFT: 865,1595 865,1405 930,1405 930,1440 905,1440 905,1555 965,1555 965,1595
  region net +1.8VD: 3165,5515 3265,5515 3265,5450 3265,5420 3105,5420 3105,5430 3165,5430
  region net +1.8VD: 3165,5755 3265,5755 3265,5690 3265,5660 3105,5660 3105,5670 3165,5670
  region net +1.8VD: 3870,4480 3910,4480 3910,4405 3970,4405 3970,4375 3810,4375 3810,4385 3870,4385
  region net +3.3VPSU: 3720,3775 3885,3775 3885,3650 3850,3650 3850,3685 3735,3685 3735,3610 3720,3610
  region net +1.8VD: 3695,3795 3885,3795 3885,3965 3850,3965 3850,3835 3735,3835 3735,4025 3695,4025
  region net +3.3VPSU: 3085,4100 3165,4100 3165,4115 3205,4115 3205,4075 3135,4075 3135,4000 3085,4000
  region net +1.8VD: 3165,5995 3265,5995 3265,5930 3265,5900 3105,5900 3105,5910 3165,5910
  region net +3.3VPSU: 2640,5460 2640,5750 2740,5750 2740,5525 2670,5525 2670,5460
  region net +1.8VD: 2775,3440 2775,3400 2725,3400 2725,3340 2695,3340 2695,3500 2705,3500 2705,3440
  region net +1.8VD: 2585,3290 2585,3250 2535,3250 2535,3190 2505,3190 2505,3350 2515,3350 2515,3290
Bottom Layer:
  region net RSTb_RETIME_18: 2770,3235 2815,3280 2815,3235
  region net +1.8VD: 3287.12,2918.68 3287.12,2897.88 3290,2895 3235,2895 3235,2969.2 3235.8,2970

## Silkscreen, mask and mechanical layers (free items; w line width, h text height)
Top Overlay:
  lines w10: 195,2250 1065,2250 1065,3715 195,3715 195,2250 ; 4525,2335 5395,2335 5395,3800 4525,3800 4525,2335
  text "PSU" at 4326,4960 h30
  text "LDO" at 4326,4840 h30
  text "PSU" at 1179.03,4630 h30
  text "PSU" at 4316,4630 h30
  text "LDO" at 1179.03,4510 h30
  text "LDO" at 4316,4510 h30
  text "VDDHV" at 730,3890.01 h60
  text "33PSU" at 730,3790.01 h60
  text "MAIN" at 5245,3539.98 h40 r270
  text "PSU" at 920,3356 h30 r90
  text "AON" at 350,3341.68 h40 r90
  text "MAIN" at 3485,3329 h30 r270
  text "LED_MAIN" at 3587.5,3329 h30 r270
  text "CFD_MAIN" at 3687.5,3329 h30 r270
  text "SMALL" at 3785,3329 h30 r270
  text "LED_SMALL" at 3887.5,3329 h30 r270
  text "CFD_SMALL" at 3987.5,3329 h30 r270
  text "SMALL" at 5245,3148.3 h40 r270
  text "TEST" at 350,2906.69 h40 r90
  text "LDO" at 820,2894.03 h30 r90
  text "DISCRETE" at 5245,2789.95 h40 r270
  text "PSU" at 4675,2484 h30 r270
  text "LDO" at 4775,2484 h30 r270
  text "PSU" at 920,2474.03 h30 r90
  text "SHIFT" at 350,2470.03 h40 r90